# Altium PCB PCB1.PcbDoc
Units mm, origin at the board's own origin, x right, y up, seen from the top; angles counter-clockwise.
Board outline 37.46 x 39.5 mm, 2 copper layers (Top Layer, Bottom Layer); 3 components, 8 nets, 15 pads, 0 vias.
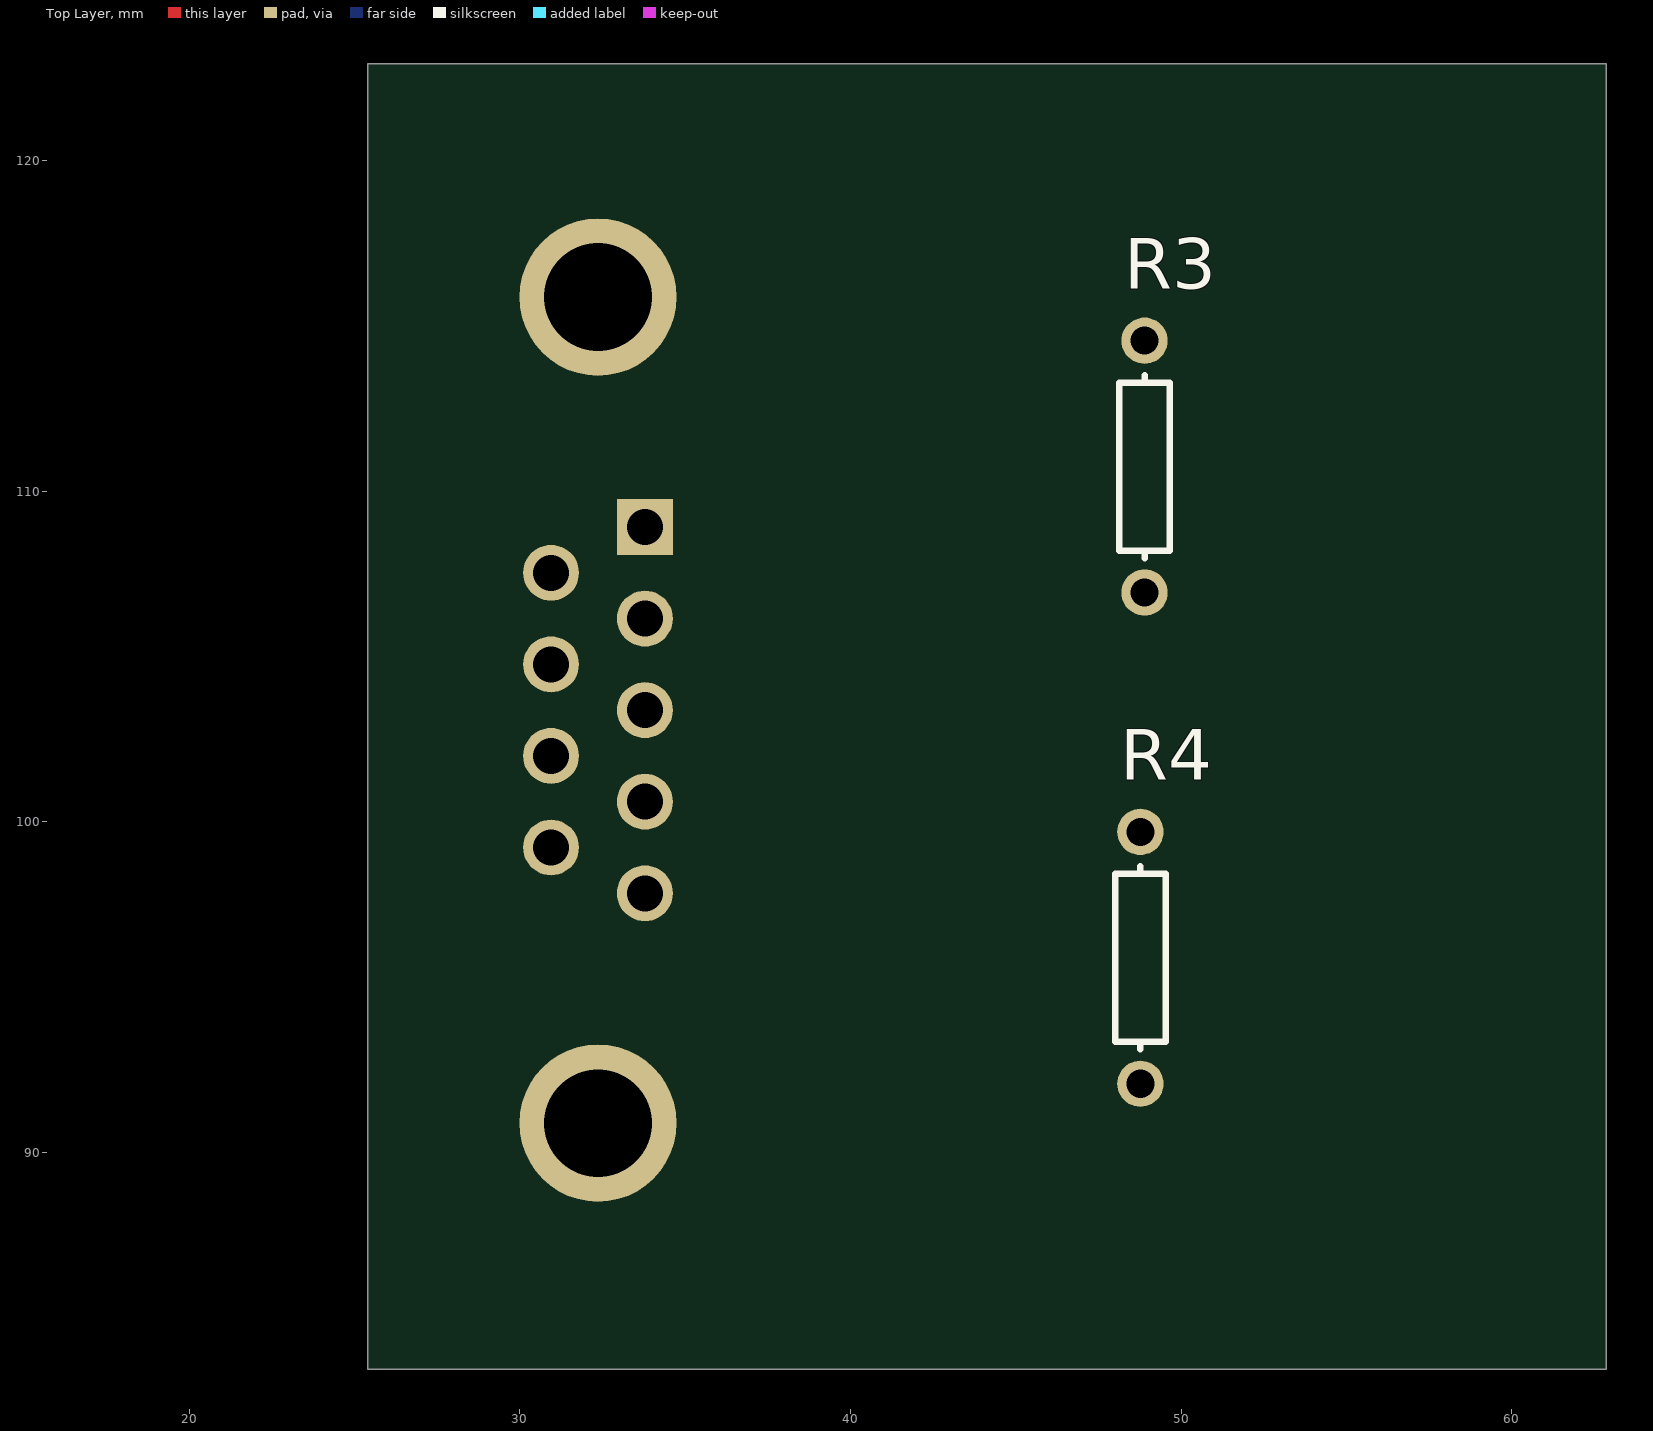
[diagram p0: Top Layer view]
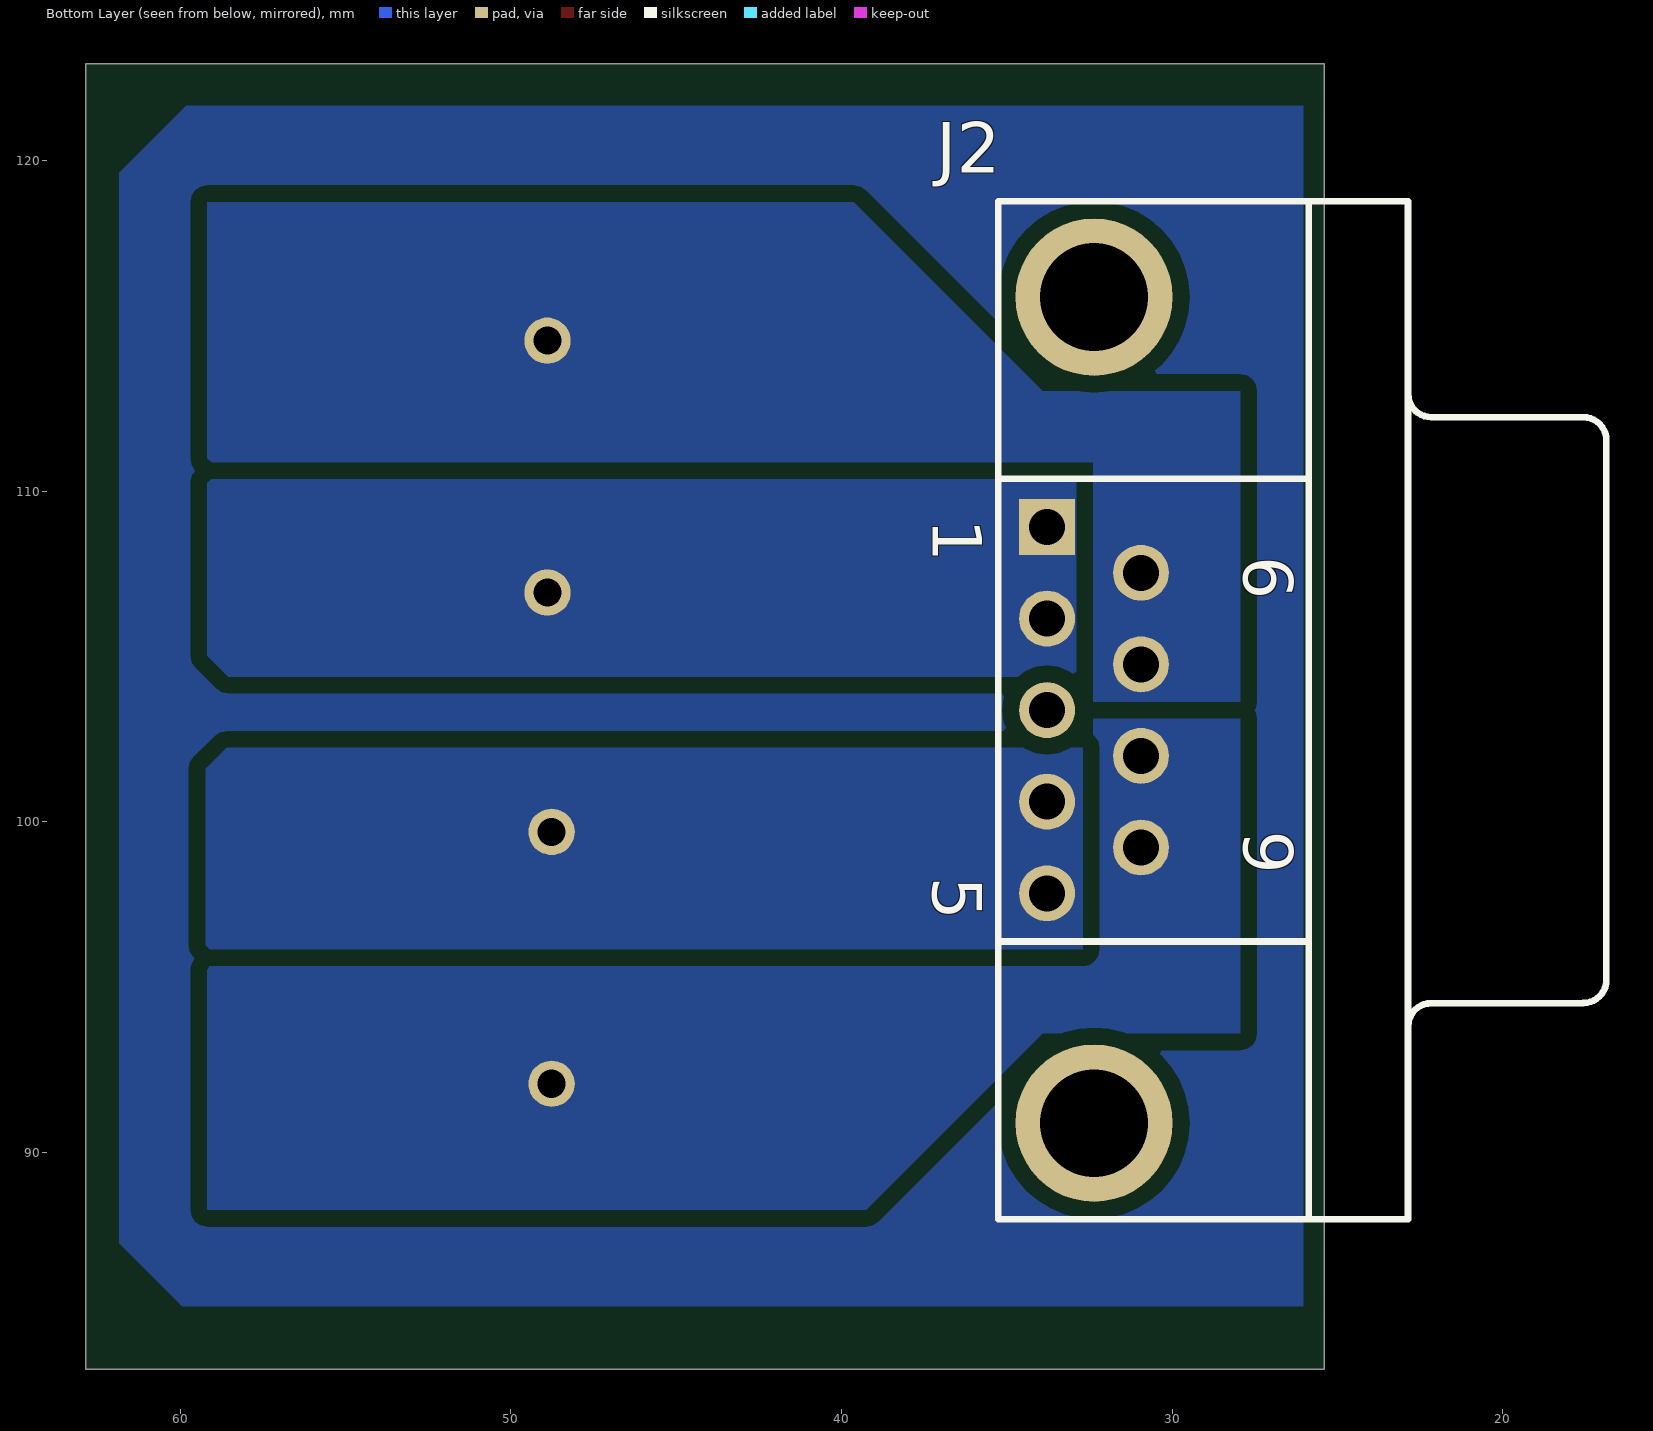
[diagram p1: Bottom Layer view, seen from below]

## Layer stack, top to bottom
Top Solder: solder mask 0.0102, Solder Resist, Dk 3.5
Top Layer: signal copper 0.0356
Dielectric 1: dielectric 0.32, FR-4, Dk 4.8
Bottom Layer: signal copper 0.0356
Bottom Solder: solder mask 0.0102, Solder Resist, Dk 3.5

## Board outline
25.4,83.439 62.865,83.439 62.865,122.936 25.4,122.936

## Design rules (kind name [scope] priority, off if disabled: settings)
Clearance [All] p1: gap=0.5
PolygonConnect [All] p1: connectstyle=Direct reliefconductorwidth=0.254 reliefentries=4 polygonreliefangle="90 Angle" airgapwidth=0.254
RoutingVias [All] p1: holewidth=0.711 width=1.27 viastyle="Through Hole" minholewidth=0.711 minwidth=1.27 maxholewidth=0.711 maxwidth=1.27
SolderMaskExpansion [All] p1: expansion=0.102
Width [All] p1: maxlimit=3 minlimit=0.254 preferedwidth=0.254 minimp=50.000000 maximp=50.000000 favimp=50.000000
30 further rules are at their usual default settings.

## Components (designator, comment, footprint, x,y, rotation, side; value= is the part's Value field where it differs from the comment)
J2 "D Connector 9" DSUB1.385-2H9 22.86,103.378 r270 bottom
R3 "Res1" AXIAL-0.3 48.895,110.744 r270 top
R4 "Res1" AXIAL-0.3 48.768,95.885 r270 top

## Footprints (in the part's own frame and the unit in brackets; to place one, negate y for a bottom-side part, rotate by r counter-clockwise, add the part's x,y. Pads: shape width x height; smd on the part's side, far side on the other; paste and mask are expansions set on the pad)
AXIAL-0.3 [mm] "Axial Device, Thru-Hole; 2 Leads; 0.3 in Pin Spacing"
  round 1.4 hole 0.85: 1(-3.81,0) 2(3.81,0)
  silkscreen extent -2.77,-0.76 2.77,0.76
DSUB1.385-2H9 [mm] "Connector; D Subminiature; 9 Position; Right Angle; Pitch 1.385 mm"
  rect 1.69x1.69 hole 1.09: 1(-5.54,-10.92)
  round 1.69 hole 1.09: 2(-2.77,-10.92) 3(0,-10.92) 4(2.77,-10.92) 5(5.54,-10.92) 6(-4.155,-8.08) 7(-1.385,-8.08) 8(1.385,-8.08) 9(4.155,-8.08)
  round 4.76 hole 3.26: 10(-12.495,-9.5) 11(12.495,-9.5)
  silkscreen extent -15.4,-12.4 15.4,6

## Part data
J2: "Receptacle Assembly, 9 Position, Right Angle"
R3 R4: "Resistor"

## Nets (pads, with @x,y where several pads share a name; then routed paths per layer and width w, separated by ;. In a path a pad name is that pad's centre, name@x,y a point inside that pad or via, vN(x,y) a via of type N, cw(c..) or ccw(c..) an arc to the next point about the centre after c; other vN are vias at no path point)
NetJ1_1: 
NetJ1_4: 
NetJ1_6: 
NetJ1_8: 
NetJ2_1: J2.1 J2.2 R3.2
NetJ2_4: J2.4 J2.5 R4.1
NetJ2_6: J2.6 J2.7 R3.1
NetJ2_8: J2.8 J2.9 R4.2
pads on no net: J2.3 J2.10 J2.11

## Polygon pours and split planes (outlines as drawn)
no net on Bottom Layer "NONET_L02_P008" (solid, pour order 8): 26.035,121.666 59.817,121.666 61.849,119.634 61.849,87.376 61.849,87.249 59.944,85.344 26.035,85.344
NetJ2_8 on Bottom Layer "NETJ2_8_L02_P006" (solid, pour order 6): 32.385,102.489 32.385,103.124 27.94,103.124 27.94,93.599 31.623,93.599 33.909,93.599 39.243,88.265 59.182,88.265 59.182,95.631 59.055,95.758 32.385,95.758
NetJ2_4 on Bottom Layer "NETJ2_4_L02_P004" (solid, pour order 4): 32.694,102.235 32.694,96.139 59.11,96.139 59.237,96.266 59.237,101.6 58.602,102.235
NetJ2_1 on Bottom Layer "NETJ2_1_L02_P002" (solid, pour order 2): 32.639,104.394 32.639,110.49 59.055,110.49 59.182,110.363 59.182,105.029 58.547,104.394
NetJ2_6 on Bottom Layer "NETJ2_6_L02_P000" (solid, pour order 0): 32.385,104.14 32.385,103.505 27.94,103.505 27.94,113.03 31.623,113.03 33.909,113.03 39.624,118.745 59.182,118.745 59.182,110.998 59.055,110.871 32.385,110.871

## Silkscreen, mask and mechanical layers (free items; w line width, h text height)
Mechanical 1:
  the board outline again, w0.5

## Text inside footprints (layer, text, board x,y; h text height)
J2: Bottom Overlay "6" at 27.835,108.033 h1.5 r90; Bottom Overlay "9" at 27.835,99.723 h1.5 r90; Bottom Overlay "5" at 37.235,98.338 h1.5 r90; Bottom Overlay "1" at 37.235,109.168 h1.5 r90